# Altium PCB Master-Slave.PcbDoc (part 2 of 2)
Units mil, origin at the board's own origin, x right, y up, seen from the top; angles counter-clockwise.
Board outline 5500 x 5500 mil, 4 copper layers (Top Layer, Ground, Power, Bottom Layer); 264 components, 141 nets, 902 pads, 458 vias.
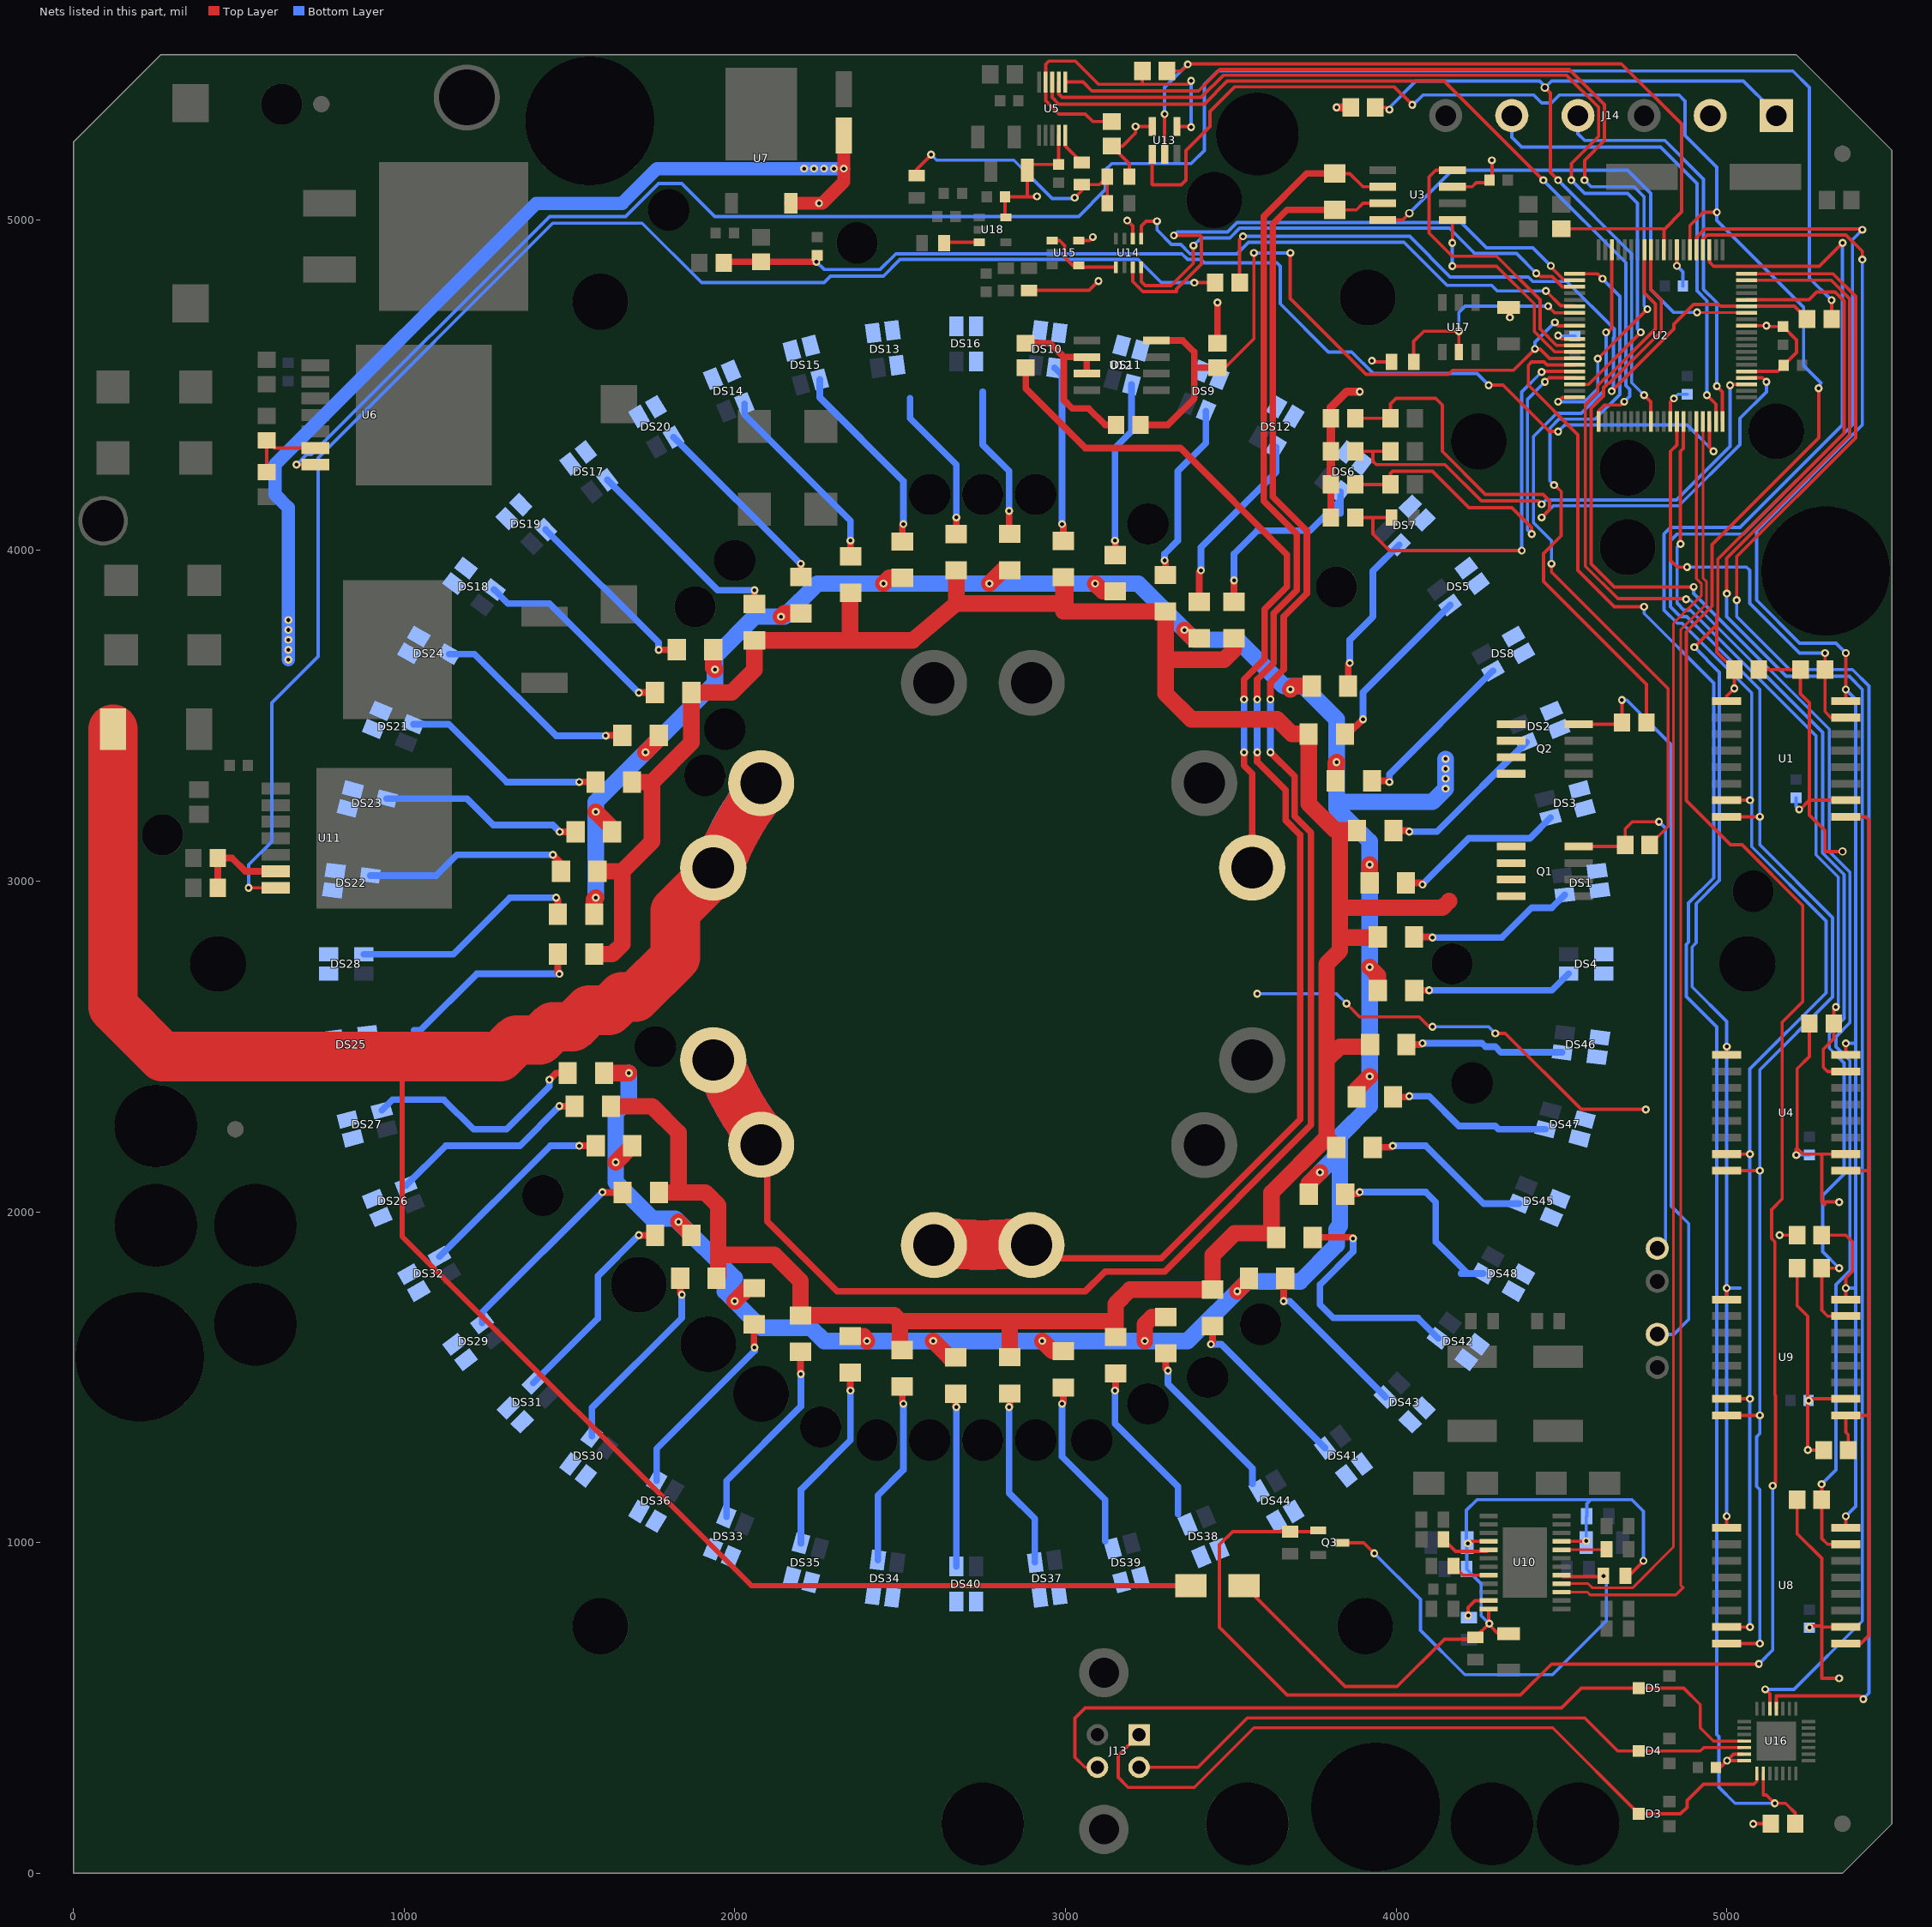
[diagram p4: the nets of this part, all layers, seen from the top]

## Via types
v1: diameter 24, hole 12, Top Layer to Bottom Layer, 374 vias
v2: diameter 25, hole 15, Top Layer to Bottom Layer, 64 vias
v3: diameter 31, hole 15, Top Layer to Bottom Layer, 15 vias
v4: diameter 28.03, hole 28, Top Layer to Bottom Layer, 4 vias
v5: diameter 33.86, hole 33.86, Top Layer to Bottom Layer, 1 vias

## Nets (pads, with @x,y where several pads share a name; then routed paths per layer and width w, separated by ;. In a path a pad name is that pad's centre, name@x,y a point inside that pad or via, vN(x,y) a via of type N, cw(c..) or ccw(c..) an arc to the next point about the centre after c; other vN are vias at no path point) (continued)
NetC44_2: C44.2 U10.23 | length 101.8
  Top Layer w10: v1(4218,780) 4218,804 4238.84,824.84 U10.23@4279.76,824.84
  Bottom Layer w10: v1(4218,780) 4218,775.46 C44.2@4220,773.46
NetC48_1: C48.1 R11.2 R12.1 R37.2 | length 786.6
  Top Layer w10: R12.1@2550,5133.46 2550,5153 v1(2594,5197) ; v1(3028,5067) 3050,5089 C48.1@3050,5106.54 3103.07,5106.54 R11.2@3126.54,5130 R37.2@3126.54,5050
  Bottom Layer w10: v1(2594,5197) 2610.5,5180.5 2843.85,5180.5 2959.85,5064.5 3025.5,5064.5 v1(3028,5067)
NetC48_2: C48.2 U5.10 | length 102.8
  Top Layer w10: U5.10@2999.37,5255.29 2999.37,5224.09 C48.2@3050,5173.46
NetC50_2: C50.2 R24.1 R25.2 U2.18 | length 3450.3
  Top Layer w10: v1(4280,4500) 4323.5,4500 4463.5,4360 v1(4490,4360) ; U2.18@4947.64,4390.16 4947.64,4312.36 v1(4960,4300)
  Top Layer w20: R24.1@1965,4873 R25.2@2080,4873 v1(2247,4873)
  Bottom Layer w10: v1(2247,4873) 2270,4850 2440,4850 2487.5,4897.5 3352.1,4897.5 3369.6,4880 3410,4880 3420,4870 3640,4870 3650,4860 3650,4746 3795.39,4600.61 3865.74,4600.61 3930.85,4535.5 4244.5,4535.5 v1(4280,4500) ; v1(4490,4360) 4510,4380 4880,4380 v1(4960,4300)
NetD3_3: D3.3 J13.1 U16.8 | length 2357
  Top Layer w10: J13.1@3222.83,419.21 3160,356.38 3160,290 3190,260 3390,260 3570,440 4473.74,440 D3.3@4733.74,180 4860,180 4880,200 4880,220 4930,270 5082,270 5090.94,278.94 U16.8@5090.94,302.4
NetD4_3: D4.3 J13.2 U16.5 | length 1934.1
  Top Layer w10: J13.2@3222.83,320.79 3400.79,320.79 3550,470 4570,470 4670,370 4920,370 4930.31,380.31 U16.5@5049.45,380.31
NetD5_3: D5.3 J13.3 U16.4 | length 2363.6
  Top Layer w10: J13.3@3096.85,320.79 3059.21,320.79 3029.21,350.79 3029.21,469.21 3060,500 4500,500 4560,560 4870,560 4920,510 4920,440 4960,400 U16.4@5049.45,400
NetDS1_1: DS1.1 DS1.3 DS1.4 R46.2 | length 509.6
  Top Layer w20: R46.2@4054.68,2831.91 4108.09,2831.91 v1(4110,2830)
  Bottom Layer w20: v1(4110,2830) 4320,2830 4410,2920 4471.37,2920 DS1.3@4510.16,2958.79
NetDS2_1: DS2.1 DS2.3 DS2.4 R47.2 | length 515.3
  Top Layer w20: R47.2@3992.13,3152.98 4037.02,3152.98 v1(4040,3150)
  Bottom Layer w20: v1(4040,3150) 4123.82,3150 DS2.3@4394.2,3420.38
NetDS3_1: DS3.1 DS3.3 DS3.4 R58.2 | length 523.3
  Top Layer w20: R58.2@4030,2995 4075,2995 v1(4080,2990)
  Bottom Layer w20: v1(4080,2990) 4220,3130 4404.58,3130 DS3.3@4467.3,3192.72
NetDS4_1: DS4.1 DS4.3 DS4.4 R59.2 | length 487.8
  Top Layer w20: R59.2@4055,2670 v1(4100,2670)
  Bottom Layer w20: v1(4100,2670) 4471.38,2670 DS4.3@4521.85,2720.47
NetDS5_1: DS5.1 DS5.3 DS5.4 R48.2 | length 527.3
  Top Layer w20: R48.2@3845.71,3445.38 3855.38,3445.38 v1(3900,3490)
  Bottom Layer w20: v1(3900,3490) 3900,3571.41 DS5.3@4163.81,3835.22
NetDS6_1: DS6.1 DS6.3 DS6.4 R49.2 | length 600
  Top Layer w20: R49.2@3510,3845 v1(3510,3910)
  Bottom Layer w20: v1(3510,3910) 3510,3990 3580,4060 3740,4060 DS6.3@3832.07,4152.07 ; 3832.07,4112.07 DS6.3@3832.07,4177.86
NetDS7_1: DS7.1 DS7.3 DS7.4 R60.2 | length 491.4
  Top Layer w20: R60.2@3855,3590 3855,3655 v1(3860,3660)
  Bottom Layer w20: v1(3860,3660) 3860,3730 3930,3800 3930,3938.24 DS7.3@4009.3,4017.54
NetDS8_1: DS8.1 DS8.3 DS8.4 R61.2 | length 519.4
  Top Layer w20: R61.2@3927.42,3303.51 3976.49,3303.51 v1(3980,3300)
  Bottom Layer w20: v1(3980,3300) 3980,3323.12 DS8.3@4292.73,3635.85
NetDS9_1: DS9.1 DS9.3 DS9.4 R50.2 | length 548.8
  Top Layer w20: v1(3300,3970) 3302.66,3967.34 R50.2@3302.66,3925.69
  Bottom Layer w20: v1(3300,3970) 3300,3990 3340,4030 3340,4240 3424.94,4324.94 DS9.3@3424.94,4421.6
NetDS10_1: DS10.1 DS10.3 DS10.4 R51.2 | length 534
  Top Layer w20: v1(2990,4080) 2993.53,4076.47 R51.2@2993.53,4029.3
  Bottom Layer w20: DS10.3@2967.34,4552.45 2990,4529.79 v1(2990,4080)
NetDS11_1: DS11.1 DS11.3 DS11.4 R62.2 | length 536.6
  Top Layer w20: v1(3150,4030) 3151.06,4028.94 R62.2@3151.06,3986.48
  Bottom Layer w20: v1(3150,4030) 3150,4310 3199.77,4359.77 DS11.3@3199.77,4502.02
NetDS12_1: DS12.1 DS12.3 DS12.4 R63.2 | length 564.5
  Top Layer w20: R63.2@3404.82,3844.88 3404.82,3934.82 v1(3410,3940)
  Bottom Layer w20: v1(3410,3940) 3410,4010 3637,4237 DS12.3@3637,4313.21
NetDS13_1: DS13.1 DS13.3 DS13.4 R52.2 | length 468
  Top Layer w20: R52.2@2670,4050 v1(2670,4100)
  Bottom Layer w20: 2530,4460 2530,4400 2670,4260 v1(2670,4100)
NetDS14_1: DS14.1 DS14.3 DS14.4 R53.2 | length 594.7
  Top Layer w20: v1(2350,4030) 2350.35,4029.65 R53.2@2350.35,3982.34
  Bottom Layer w20: DS14.3@2029.62,4444.2 2029.62,4410.38 2350,4090 v1(2350,4030)
NetDS15_1: DS15.1 DS15.3 DS15.4 R64.2 | length 595.9
  Top Layer w20: R64.2@2506.86,4027.36 2506.86,4076.86 v1(2510,4080)
  Bottom Layer w20: DS15.3@2257.28,4517.3 2257.28,4462.72 2510,4210 v1(2510,4080)
NetDS16_1: DS16.1 DS16.3 DS16.4 R65.2 | length 461.1
  Top Layer w20: R65.2@2830,4052.08 v1(2830,4120)
  Bottom Layer w20: 2750,4480 2750,4320 2830,4240 v1(2830,4120)
NetDS17_1: DS17.1 DS17.3 DS17.4 R54.2 | length 625.3
  Top Layer w20: R54.2@2059.51,3838.39 2059.51,3879.51 v1(2060,3880)
  Bottom Layer w20: DS17.3@1614.78,4213.81 1948.59,3880 v1(2060,3880)
NetDS18_1: DS18.1 DS18.3 DS18.4 R55.2 | length 616.4
  Top Layer w20: v1(1710,3570) 1711.02,3571.02 R55.2@1758.81,3571.02
  Bottom Layer w20: DS18.3@1272.14,3882.07 1314.21,3840 1440,3840 v1(1710,3570)
NetDS19_1: DS19.1 DS19.3 DS19.4 R66.2 | length 559.8
  Top Layer w20: v1(1770,3700) R66.2@1825,3700
  Bottom Layer w20: DS19.3@1428.46,4063.3 1770,3721.76 v1(1770,3700)
NetDS20_1: DS20.1 DS20.3 DS20.4 R67.2 | length 583.2
  Top Layer w20: v1(2200,3960) 2200.06,3959.94 R67.2@2200.06,3920.17
  Bottom Layer w20: DS20.3@1815.15,4342.73 2197.88,3960 v1(2200,3960)
NetDS21_1: DS21.1 DS21.3 DS21.4 R56.2 | length 623.3
  Top Layer w20: v1(1530,3300) 1530.26,3300.26 R56.2@1579.17,3300.26
  Bottom Layer w20: DS21.3@1028.4,3474.94 1135.06,3474.94 1310,3300 v1(1530,3300)
NetDS22_1: DS22.1 DS22.3 DS22.4 R57.2 | length 638.8
  Top Layer w20: v1(1450,3080) 1475,3055 R57.2@1475,3030
  Bottom Layer w20: DS22.3@897.55,3017.34 1097.34,3017.34 1160,3080 v1(1450,3080)
NetDS23_1: DS23.1 DS23.3 DS23.4 R68.2 | length 612.5
  Top Layer w20: v1(1470.76,3149.24) R68.2@1518.86,3149.24
  Bottom Layer w20: DS23.3@947.98,3249.77 1190.23,3249.77 1270,3170 1450,3170 v1(1470.76,3149.24)
NetDS24_1: DS24.1 DS24.3 DS24.4 R69.2 | length 626.5
  Top Layer w20: v1(1610,3440) 1611.3,3441.3 R69.2@1660.39,3441.3
  Bottom Layer w20: DS24.3@1136.79,3687 1213,3687 1460,3440 v1(1610,3440)
NetDS25_1: DS25.1 DS25.3 DS25.4 R88.2 | length 572.5
  Top Layer w20: R88.2@1465,2780 1465,2725 v1(1470,2720)
  Bottom Layer w20: 1030,2550 1050,2550 1220,2720 v1(1470,2720)
NetDS26_1: DS26.1 DS26.3 DS26.4 R89.2 | length 609.5
  Top Layer w20: v1(1470,2320) 1470.37,2319.63 R89.2@1515.55,2319.63
  Bottom Layer w20: DS26.3@1005.8,2079.62 1126.18,2200 1350,2200 v1(1470,2320)
NetDS27_1: DS27.1 DS27.3 DS27.4 R100.2 | length 695.3
  Top Layer w20: v1(1440,2400) 1460,2420 R100.2@1495,2420
  Bottom Layer w20: DS27.3@932.7,2307.28 965.42,2340 1120,2340 1210,2250 1310,2250 1440,2380 v1(1440,2400)
NetDS28_1: DS28.1 DS28.3 DS28.4 R101.2 | length 704.5
  Top Layer w20: v1(1460,2950) 1465,2945 R101.2@1465,2900
  Bottom Layer w20: DS28.3@878.15,2779.53 1149.53,2779.53 1320,2950 v1(1460,2950)
NetDS29_1: DS29.1 DS29.3 DS29.4 R90.2 | length 607.3
  Top Layer w20: v1(1600,2060) 1600.88,2059.12 R90.2@1661.02,2059.12
  Bottom Layer w20: DS29.3@1236.19,1664.78 1236.19,1696.19 v1(1600,2060)
NetDS30_1: DS30.1 DS30.3 DS30.4 R91.2 | length 592.6
  Top Layer w20: R91.2@1835,1800 1835,1755 v1(1840,1750)
  Bottom Layer w20: DS30.3@1567.93,1322.14 1567.93,1407.93 1840,1680 v1(1840,1750)
NetDS31_1: DS31.1 DS31.3 DS31.4 R102.2 | length 629.3
  Top Layer w20: v1(1710,1930) 1710.66,1929.34 R102.2@1759.22,1929.34
  Bottom Layer w20: DS31.3@1390.7,1482.46 1586.13,1677.89 1586.13,1806.13 v1(1710,1930)
NetDS32_1: DS32.1 DS32.3 DS32.4 R103.2 | length 611.5
  Top Layer w20: v1(1530,2200) 1530.14,2200.14 R103.2@1580,2200.14
  Bottom Layer w20: DS32.3@1107.27,1865.15 1442.12,2200 v1(1530,2200)
NetDS33_1: DS33.1 DS33.3 DS33.4 R92.2 | length 592.4
  Top Layer w20: R92.2@2198.71,1577.1 2198.71,1511.29 v1(2200,1510)
  Bottom Layer w20: DS33.3@1975.06,1078.4 1975.06,1187.04 2200,1411.98 v1(2200,1510)
NetDS34_1: DS34.1 DS34.3 DS34.4 R93.2 | length 558.1
  Top Layer w20: R93.2@2506.78,1472.25 2506.78,1423.22 v1(2510,1420)
  Bottom Layer w20: DS34.3@2432.66,947.55 2432.66,1142.66 2510,1220 v1(2510,1420)
NetDS35_1: DS35.1 DS35.3 DS35.4 R104.2 | length 578.6
  Top Layer w20: R104.2@2349.19,1514.26 2349.19,1460.81 v1(2350,1460)
  Bottom Layer w20: DS35.3@2200.23,997.98 2200.23,1160.23 2350,1310 v1(2350,1460)
NetDS36_1: DS36.1 DS36.3 DS36.4 R105.2 | length 596.5
  Top Layer w20: R105.2@2058.45,1660.02 2058.45,1591.55 v1(2060,1590)
  Bottom Layer w20: DS36.3@1764,1186.79 1764,1284 2060,1580 v1(2060,1590)
NetDS37_1: DS37.1 DS37.3 DS37.4 R94.2 | length 542.6
  Top Layer w20: v1(2830,1410) 2831.53,1411.53 R94.2@2831.53,1451.1
  Bottom Layer w20: v1(2830,1410) 2830,1150 2907.41,1072.59 DS37.3@2907.41,941.21
NetDS38_1: DS38.1 DS38.3 DS38.4 R95.2 | length 505.8
  Top Layer w20: v1(3150,1460) 3151.68,1461.68 R95.2@3151.68,1511.69
  Bottom Layer w20: v1(3150,1460) 3150,1360 3340.61,1169.39 3340.61,1085.57
NetDS39_1: DS39.1 DS39.3 DS39.4 R106.2 | length 519.5
  Top Layer w20: v1(2990,1420) 2993.89,1423.89 R106.2@2993.89,1468.91
  Bottom Layer w20: v1(2990,1420) 2990,1260 3120.36,1129.64 DS39.3@3120.36,1005.06
NetDS40_1: DS40.1 DS40.3 DS40.4 R107.2 | length 522.9
  Top Layer w20: R107.2@2668.41,1450.16 2668.41,1411.59 v1(2670,1410)
  Bottom Layer w20: v1(2670,1410) 2670,928.62 DS40.3@2670.47,928.15
NetDS41_1: DS41.1 DS41.3 DS41.4 R96.2 | length 532.4
  Top Layer w20: v1(3440,1600) 3444.76,1604.76 R96.2@3444.76,1655.22
  Bottom Layer w20: v1(3440,1600) 3471.41,1600 DS41.3@3785.22,1286.19
NetDS42_1: DS42.1 DS42.3 DS42.4 R97.2 | length 760.6
  Top Layer w20: R97.2@3747.65,1923.32 v1@3866.68,1923.32
  Bottom Layer w20: v1(3870,1920) 3870,1880 3770,1780 3770,1720 3810,1680 4065.79,1680 DS42.3@4127.86,1617.93
NetDS43_1: DS43.1 DS43.3 DS43.4 R108.2 | length 492.4
  Top Layer w20: v1(3660,1730) R108.2@3660,1795
  Bottom Layer w20: v1(3660,1730) 3678.24,1730 DS43.3@3967.54,1440.7
NetDS44_1: DS44.1 DS44.3 DS44.4 R109.2 | length 503.2
  Top Layer w20: R109.2@3303.58,1572.46 3303.58,1526.42 v1(3310,1520)
  Bottom Layer w20: v1(3310,1520) 3310,1480 3565.43,1224.57 DS44.3@3565.43,1177.69
NetDS45_1: DS45.1 DS45.3 DS45.4 R98.2 | length 516.7
  Top Layer w20: R98.2@3929.23,2195.59 3985.59,2195.59 v1(3990,2200)
  Bottom Layer w20: v1(3990,2200) 4090,2200 4264.94,2025.06 DS45.3@4371.6,2025.06
NetDS46_1: DS46.1 DS46.3 DS46.4 R99.2 | length 484
  Top Layer w20: R99.2@4031.39,2506.06 4076.06,2506.06 v1(4080,2510)
  Bottom Layer w20: v1(4080,2510) 4260,2510 4270,2500 4300,2500 4317.34,2482.66 DS46.3@4502.45,2482.66
NetDS47_1: DS47.1 DS47.3 DS47.4 R110.2 | length 503.8
  Top Layer w20: R110.2@3990.61,2347.54 4037.54,2347.54 v1(4040,2350)
  Bottom Layer w20: v1(4040,2350) 4100,2350 4190,2260 4300,2260 4309.77,2250.23 DS47.3@4452.02,2250.23
NetDS48_1: DS48.1 DS48.3 DS48.4 R111.2 | length 658.7
  Top Layer w20: R111.2@3846.27,2054.25 3884.25,2054.25 v1(3890,2060)
  Bottom Layer w20: v1(3890,2060) 3950,2060 4090,2060 4120,2030 4120,1910 4216,1814 DS48.3@4263.21,1814 4196,1814
NetDS49_1: DS49.1 Q1.4 R28.2 | length 1603.4
  Top Layer w10: Q1.4@4552.36,3105 R28.2@4688,3105 ; R28.2@4693,3110 4693,3158 4715,3180 v1(4795,3180)
  Bottom Layer w10: DS49.1@4790,1890 4815,1915 4815,3160 v1(4795,3180)
NetDS50_1: DS50.1 Q2.4 R40.2 | length 2272.4
  Top Layer w10: Q2.4@4552.36,3475 R40.2@4678,3475 ; R40.2@4683,3480 v1(4683,3548)
  Bottom Layer w10: v1(4683,3548) 4697.36,3548 4832.5,3412.86 4832.5,2017.5 4885,1965 4885,1675 4840,1630 DS50.1@4790,1630
NetJ3_1: J3.1 J7.1 R5.2 U3.7 | length 6014.2
  Top Layer w10: R5.2@3815,5030 3880,5030 3900,5050 U3.7@3959.68,5050
  Top Layer w20: J3.1@2098.18,2203.06 2098.18,1971.82 2310,1760 3060,1760 3120,1820 3300,1820 3742.9,2262.9 3742.9,3147.1 3693.21,3196.79 3693.21,3316.79 v1(3620,3390) ; v1(3620,3550) 3620,3600 3660,3640 3660,3800 3730,3870 3730,4060 3627.5,4162.5 3627.5,4987.5 3670,5030 R5.2@3815,5030
  Top Layer w150: J7.1@1951.63,2459.42 ccw(c2750,2750) J3.1@2099.16,2203.88
  Bottom Layer w20: J7.1@1932.21,2440 J7.1@1951.63,2459.42 ; v1(3620,3390) v1(3620,3550)
  Bottom Layer w150: J7.1@1951.63,2459.42 ccw(c2750,2750) J3.1@2099.16,2203.88
NetJ4_1: J4.1 J8.1 R5.1 U3.6 | length 5203.5
  Top Layer w10: R5.1@3815,5140 3860,5140 3900,5100 U3.6@3959.68,5100
  Top Layer w20: J4.1@2897.59,1912.95 2950.55,1860 3290,1860 3710,2280 3710,3140 3665.71,3184.29 3665.71,3275.4 3580,3361.11 v1(3580,3390) ; v1(3580,3550) 3580,3610 3630,3660 3630,3810 3700,3880 3700,4050 3600,4150 3600,5010 3730,5140 R5.1@3815,5140
  Top Layer w150: J8.1@2602.41,1912.95 ccw(c2750,2750) J4.1@2897.59,1912.95
  Bottom Layer w20: v1(3580,3390) v1(3580,3550)
  Bottom Layer w150: J8.1@2602.41,1912.95 ccw(c2750,2750) 2602.87,1912.87 ccw(c2750,2750) 2897.59,1912.95 cw(c2750,2750) J8.1@2602.41,1912.95
NetJ11_1: J11.1 R128.1 | length 2155.4
  Top Layer w10: J11.1@3580,3011.71 3550.39,3041.32 J11.1@3580,3070.93
  Top Layer w20: R128.1@2880,4553 2880,4490 3060,4310 3347.78,4310 3670,3987.78 3670,3890 3602.5,3822.5 3602.5,3672.5 3540,3610 v1(3540,3550) ; v1(3540,3390) 3540,3350 3565,3325 J11.1@3565,3041.32
  Bottom Layer w20: v1(3540,3390) v1(3540,3550)
NetJ14_1: J14.1 R4.1 U2.9 | length 2451.6
  Top Layer w10: R4.1@3937,5340 3973,5340 v1(3980,5333) ; v2(4450,5400) 4466.33,5383.67 4466.33,5143.67 v1(4490,5120) ; v1(4750,4470) 4770.47,4449.53 U2.9@4770.47,4390.16
  Bottom Layer w10: v1(3980,5333) 3980,5340 4060,5420 4434.12,5420 v2@4452.06,5402.06 ; v2(4450,5400) 4470,5420 5050,5420 5135,5335 J14.1@5150,5335 ; v1(4490,5120) 4712.5,4897.5 4712.5,4507.5 v1(4750,4470)
NetJ14_4: J14.4 U2.20 | length 1267.9
  Top Layer w10: v1(4970,4497.01) 4987.01,4480 U2.20@4987.01,4390.16
  Bottom Layer w10: J14.4@4550,5335 4550,5260 4570,5240 4812.5,5240 4930,5122.5 4930,4790 4970,4750 v1(4970,4497.01)
NetJ14_5: J14.5 U2.19 | length 1446.6
  Top Layer w10: v1(4940,4470) 4967.32,4442.68 U2.19@4967.32,4390.16
  Bottom Layer w10: J14.5@4350,5335 4350,5250 4380,5220 4800,5220 4910,5110 4910,4785.25 4940,4755.25 v1(4940,4470)
NetJP1_1: JP1.1 R19.1 U2.24 | length 1887.3
  Top Layer w10: R19.1@3877,4400 JP1.1@3983,4400 3983,4443 4000,4460 4120,4460 4140,4440 4140,4300 4270,4170 4444.65,4170 4464.5,4150.15 4464.5,4124.5 v1(4440,4100) ; U2.24@5059.84,4522.05 5107.95,4522.05 v1(5120,4510)
  Bottom Layer w10: v1(4440,4100) 4475.5,4135.5 4854.9,4135.5 5040,4320.6 5040,4400 5120,4480 v1(5120,4510)
NetJP2_1: JP2.1 R23.1 U2.23 | length 1577.9
  Top Layer w10: R23.1@3877,4300 JP2.1@3983,4300 ; 3930,4300 3930,4270 3940,4260 4147.5,4260 4257.5,4150 4430,4150 v1(4440,4140) ; v1(5010,4500) 5012.36,4502.36 U2.23@5059.84,4502.36
  Bottom Layer w10: v1(4440,4140) 4453,4153 4847.65,4153 5010,4315.35 v1(5010,4500)
NetJP3_1: JP3.1 R26.1 U2.77 | length 1241.4
  Top Layer w10: R26.1@3877,4200 JP3.1@3983,4200 3983,4233 3990,4240 4110,4240 4220,4130 4350,4130 4410,4070 v1(4410,4050) ; v1(4450,4510) 4462.05,4522.05 U2.77@4540.16,4522.05
  Bottom Layer w10: v1(4410,4050) 4397.5,4062.5 4397.5,4457.5 v1(4450,4510)
NetJP4_1: JP4.1 R27.1 U2.76 | length 1292.4
  Top Layer w10: R27.1@3877,4100 JP4.1@3983,4100 ; 3930,4100 3930,4050 3960,4020 3980,4000 v1(4380,4000) ; v1(4440,4540) 4441.73,4541.73 U2.76@4540.16,4541.73
  Bottom Layer w10: v1(4380,4000) 4380,4480 v1(4440,4540)
NetQ1_5: Q1.5 Q1.6 Q1.7 Q1.8 R46.1 R47.1 R48.1 R49.1 R50.1 R51.1 R52.1 R53.1 R54.1 R55.1 R56.1 R57.1 R88.1 R89.1 R90.1 R91.1 R92.1 R93.1 R94.1 R95.1 R96.1 R97.1 R98.1 R99.1 | length 9576.5
  Top Layer w50: R88.1@1575,2780 1630,2780 1660,2810 1660,3030 ; R57.1@1585,3030 1660,3030 ; R89.1@1625.55,2319.63 1750.37,2319.63 1830,2240 1830,2059.12 ; R56.1@1689.44,3300 1750,3300 ; R90.1@1771.02,2059.12 1910.88,2059.12 1950,2020 1950,1805 R91.1@1945,1800 ; 1950,1870 2120,1870 2198.71,1791.29 R92.1@2198.71,1687.1 2482.9,1687.1 2500,1670 ; 2348.39,3728.39 R53.1@2348.39,3870.38 ; R93.1@2506.78,1582.25 2500,1589.03 2500,1670 ; R52.1@2670,3940 2670,3840 ; R94.1@2831.53,1561.1 2831.53,1668.47 ; R51.1@2993.53,3919.3 3000,3912.82 3000,3840 2670,3840 ; R51.1@2994.31,3918.51 2994.31,3815.69 R50.1@3302.66,3815.69 3302.66,3567.34 3380,3490 3640,3490 3684.62,3445.38 R48.1@3735.71,3445.38 3735.71,3234.29 3815.71,3154.29 R47.1@3880.82,3154.29 ; R95.1@3151.68,1621.69 3151.68,1721.68 3195.22,1765.22 R96.1@3444.76,1765.22 3444.76,1868.69 3511.57,1935.5 3625.47,1935.5 R97.1@3637.65,1923.32 3623.5,1937.47 3623.5,2058.32 3790,2224.82 ; 3151.68,1670 3141.68,1660 3131.68,1670 2500,1670 ; 3302.66,3670 3480,3670 3510,3700 R49.1@3510,3735 ; 3790,2460 3830,2500 3915.33,2500 R99.1@3921.39,2506.06 ; R98.1@3819.23,2195.59 3790,2224.82 ; 3830,2830 3942.77,2830 R46.1@3944.68,2831.91 ; 3830,2920 4140,2920 4160,2940 ; 3830,3154.29 3830,2790 3790,2750 3790,2224.82 ; 1660,3030 1750,3120 1750,3300 ; 1750,3300 1868.81,3418.81 R55.1@1868.81,3571.02 1991.02,3571.02 2059.51,3639.51 R54.1@2059.51,3728.39 2538.39,3728.39 2670,3840
NetQ2_5: Q2.5 Q2.6 Q2.7 Q2.8 R58.1 R59.1 R60.1 R61.1 R62.1 R63.1 R64.1 R65.1 R66.1 R67.1 R68.1 R69.1 R100.1 R101.1 R102.1 R103.1 R104.1 R105.1 R106.1 R107.1 R108.1 R109.1 R110.1 R111.1 | length 9819.7
  Top Layer w50: R101.1@1575,2900 1575,2945 v1(1580,2950) ; v1(1580,3210) 1628.86,3161.14 R68.1@1628.86,3149.24 ; R100.1@1605,2420 v1(1680,2420) ; v1(1640,2150) 1690,2200 R103.1@1690,2200.14 ; v1(1730,3390) 1770.39,3430.39 R69.1@1770.39,3441.3 ; v1(1830,1970) 1869.22,1930.78 R102.1@1869.22,1929.34 ; R66.1@1935,3700 1935,3645 v1(1940,3640) ; v1(2000,1730) 2040.02,1770.02 R105.1@2058.45,1770.02 ; v1(2140,3800) 2150.17,3810.17 R67.1@2200.06,3810.17 ; R104.1@2349.19,1624.26 2390,1624.26 2390,1620 v1(2400,1610) ; v1(2450,3900) 2467.36,3917.36 R64.1@2506.86,3917.36 ; v1(2600,1610) 2649.84,1560.16 R107.1@2668.41,1560.16 ; v1(2770,3900) 2810.45,3940.45 R65.1@2831.63,3940.45 ; v1(2930,1610) 2961.09,1578.91 R106.1@2993.89,1578.91 ; v1(3090,3900) 3113.52,3876.48 R62.1@3151.06,3876.48 ; v1(3240,1610) 3240,1660 3262.46,1682.46 R109.1@3303.58,1682.46 ; v1(3360.16,3759.84) 3385.12,3734.88 R63.1@3404.82,3734.88 ; v1(3520,1760) 3555,1795 R108.1@3555,1800 ; v1(3680,3580) 3690,3590 R60.1@3745,3590 ; R111.1@3736.27,2054.25 3736.27,2086.27 v1(3770,2120) ; R61.1@3817.42,3303.51 3817.42,3357.42 v1(3820,3360) ; R110.1@3880.61,2347.54 3880.61,2370.61 v1(3920,2410) ; v1(3920,2740) 3945,2715 R59.1@3945,2670 ; R58.1@3920,2995 v1(3920,3050)
  Bottom Layer w50: v1(1580,2950) 1580,3240 1940,3600 1940,3680 2060,3800 2150,3800 2250,3900 3220,3900 3390,3730 3520,3730 3660,3590 3720,3590 3820,3490 3820,3220 3920,3120 3920,2320 3830,2230 3830,2180 ; v1(1680,2420) 1680,2340 1640,2300 1640,2090 1750,1980 1820,1980 2000,1800 1970,1760 2080,1650 2230,1650 2270,1610 3370,1610 3550,1790 3640,1790 3710,1790 3820,1900 3820,1947.5 3830,1957.5 3830,2180 ; v1(3770,2120) 3830,2180 ; 3820,3240 4110,3240 v1(4150,3280) v1(4150,3310) v1(4150,3340) v1(4150,3370)
NetQ3_1: Q3.1 R34.2 U2.46 U13.1 | length 9753.3
  Top Layer w10: U13.1@3262.6,5197.68 3262.6,5107.4 3264.5,5105.5 3350.15,5105.5 3364.5,5119.85 3364.5,5209.5 3437,5282 3437,5328 3511,5402 3995,5402 v1(4049,5348) ; Q3.1@3764.57,1037.4 3760.63,1033.46 R34.2@3680,1033.46 3505.46,1033.46 3466,994 3466,744 3671,539 4376,539 4470,633 v1(5097,633) ; U2.46@4888.58,4909.84 4888.58,4982.58 4929,5023 v1(4970,5023) ; v1(5139,1172) 5147.5,1180.5 5147.5,1444.85 5145.5,1446.85 5145.5,1909.85 5135.5,1919.85 5135.5,2007.5 5167.5,2039.5 5167.5,2573.5 5229.81,2635.81 5229.81,2926.26 5046.07,3110 5011.1,3110 4877.5,3243.6 4877.5,3754.17 4955.5,3832.17 4955.5,4018.41 5278,4340.91 v1(5278,4491)
  Bottom Layer w10: v1(4049,5348) 4052,5348 4081.5,5377.5 4416.5,5377.5 4440,5354 4470,5354 4493.5,5377.5 4855.5,5377.5 4874,5359 4874,5255 4970,5159 v1(4970,5023) 4970,4998 5232.5,4735.5 5232.5,4558.5 5284.44,4506.56 v1(5278,4491) ; v1(5097,633) 5139,675 v1(5139,1172)
NetQ3_3: Q3.3 R16.1 U10.5 | length 1361.8
  Top Layer w10: Q3.3@3835.43,1000 3902,1000 v1(3934,968) ; U10.5@4500.24,901.61 4504.35,897.5 4624.04,897.5 R16.1@4626.54,900 v1(4627.54,899)
  Bottom Layer w10: v1(3934,968) 4073.51,828.49 4073.51,735.49 4208,601 4473,601 4636,764 4636,899 v1(4627.54,899)
NetR1_2: R1.2 U1.9 U2.36 U4.9 U8.9 U9.9 | length 4707.6
  Top Layer w10: v1(4902,3708) 4970,3776 4970,3800 ; U8.9@4999.88,1045 v1(4999.88,1079.88) ; U9.9@4999.88,1735 v1(4999.88,1769.88) ; U4.9@4999.88,2475 v1@4999.88,2499.88 ; U1.9@4999.88,3545 4999.88,3559.88 v1(5023,3583) R1.2@5023,3640 4970,3693 4970,3800 ; U2.36@5059.84,4758.27 5248.27,4758.27 5271.5,4781.5 5327.15,4781.5 5354.5,4754.15 5354.5,4355.66 4973,3974.16 4973,3803 4970,3800
  Bottom Layer w10: v1(4902,3708) 4978,3632 4978,3002.38 4907.93,2932.3 4907.93,2814.03 4895.19,2801.29 4895.19,2680.7 4999.88,2576.01 v1(4999.88,1769.88) ; v1(4999.88,1079.88) v1(4999.88,1769.88) ; 5039.88,1769.88 v1(4999.88,1769.88)
  other v1: 5000,2500
NetR2_2: R2.2 U1.1 U4.1 U8.1 U9.1 | length 2856.9
  Top Layer w10: U8.1@5360.12,695 5405,695 5430,720 5430,3185 5420,3195 U1.1@5360.12,3195 ; U4.1@5360.12,2125 5425,2125 ; R2.2@5367,1280 5367,1327 5360.12,1333.88 U9.1@5360.12,1385 5425,1385
NetR3_1: R3.1 U1.7 U2.13 | length 1317.2
  Top Layer w10: U2.13@4849.21,4390.16 4849.21,4319.21 4830,4300 4830,3970 4850,3950 v1(4880,3950) ; v1(5297,3690) 5297,3513 5315,3495 U1.7@5360.12,3495
  Bottom Layer w10: v1(4880,3950) 5060,3950 5070,3940 5070,3840 5220,3690 v1(5297,3690)
NetR6_1: R6.1 U2.14 U4.7 | length 2258.1
  Top Layer w10: v1(4860,4020) 4860,4300 4868.9,4308.9 U2.14@4868.9,4390.16 ; v1(5330,2620) 5324,2614 5324,2524 5292,2492 5292,2438 5305,2425 U4.7@5355.32,2425
  Bottom Layer w10: v1(4860,4020) 4850,4010 4850,3840 4870,3820 4890,3820 5270,3440 5270,3080 5337.5,3012.5 v1@5337.5,2620
NetR7_2: R7.2 R9.1 U6.6 | length 252.5
  Top Layer w10: R9.1@585,4237 R7.2@585,4333 608,4310 U6.6@732,4310
NetR8_1: R8.1 R29.1 U2.50 U13.2 | length 2656
  Top Layer w10: U13.2@3300,5197.68 v1(3300,5320) ; R29.1@3307,5450 3350,5450 v1(3370,5470) 3372,5472 4681.39,5472 4863.76,5289.63 4863.76,5023.76 4809.84,4969.84 ; R8.1@4500,4973 4806.68,4973 4809.84,4969.84 ; U2.50@4809.84,4909.84 4809.84,4969.84
  Bottom Layer w10: v1(3300,5320) 3300,5400 v1(3370,5470)
NetR10_1: R10.1 U2.52 U8.7 | length 4616
  Top Layer w10: U2.52@4770.47,4909.84 4770.47,4789.53 4802,4758 4802,4662.6 4645.9,4506.5 4641.85,4506.5 4627.5,4492.15 4627.5,4467.5 4590,4430 4590,3960 4660,3890 v1(4900,3890) ; v1(5287,1177) 5287,1013 5305,995 U8.7@5360.12,995
  Bottom Layer w10: v1(4900,3890) 4900,3870 5310,3460 5310,3090 5372.5,3027.5 5372.5,2572.5 5330,2530 5330,2500 5372.5,2457.5 5372.5,1822.5 5330,1780 5330,1220 v1(5287,1177)
NetR13_2: R13.2 U10.17 | length 153.4
  Top Layer w10: R13.2@4143.46,1010 4179.96,973.5 4274.88,973.5 U10.17@4279.76,978.39
NetR14_1: R14.1 U2.53 U9.7 | length 3993.5
  Top Layer w10: U2.53@4750.79,4909.84 4750.79,4779.21 4784.5,4745.5 4784.5,4669.85 4638.65,4524 4634.6,4524 4610,4499.4 4610,4480 4572.5,4442.5 4572.5,3952.75 4670.75,3854.5 4875.5,3854.5 v1(4877,3853) ; R14.1@5297,1840 R14.1@5287,1830 ; v1(5340,1830) R14.1@5287,1830 ; U9.7@5360.12,1685 5305,1685 5287,1703 R14.1@5287,1830
  Bottom Layer w10: v1(4877,3853) 4880,3850 4890,3850 5290,3450 5290,3085.25 5355,3020.25 5355,2585 5310,2540 5310,2495.25 5355,2450.25 5355,2115 5290,2050 5290,1880 v1(5340,1830)
NetR17_2: R17.2 R18.1 U11.6 | length 281.6
  Top Layer w20: R18.1@437,2980 R17.2@437,3070 480,3070 520,3030 U11.6@612,3030
NetR20_1: R20.1 R130.1 U2.35 | length 2300.6
  Top Layer w10: R20.1@3527,4810 3527,4940 v1(3537,4950) ; v1(4652,4482) 4840,4670 4840,4684.65 4899.85,4744.5 4975.5,4744.5 4981.42,4738.58 5204.42,4738.58 R130.1@5243,4700
  Bottom Layer w10: v1(3537,4950) 4041.25,4950 4163.67,4827.58 4399.77,4827.58 4413.85,4813.5 4516.15,4813.5 4659.5,4670.15 4659.5,4644.85 4657.5,4642.85 4657.5,4487.5 v1(4652,4482)
NetR20_2: R20.2 U11.7 | length 4608.6
  Top Layer w10: v1(530,2980) U11.7@612,2980 ; v1(3390,4810) R20.2@3453,4810
  Bottom Layer w10: v1(530,2980) 530,3050 600,3120 600,3540 740,3680 740,4280 1450,4990 1720,4990 1900,4810 2270,4810 2290,4830 2450,4830 2500,4880 3220,4880 3290,4810 v1(3390,4810)
NetR21_1: R21.1 U1.8 U2.44 U4.8 U8.8 U9.8 | length 5146.9
  Top Layer w10: U2.44@4927.95,4909.84 4927.95,4941.7 4940.75,4954.5 5360.15,4954.5 5410,4904.65 v1(5410,4880) ; R21.1@5287,1930 5360,1930 5380,1910 5380,1820 5360.12,1800.12 U9.8@5360.12,1735 ; v1(5360,3690) 5360.12,3689.88 U1.8@5360.12,3545 ; U8.8@5360.12,1045 v1(5360.12,1079.88) ; U4.8@5360.12,2475 v1(5360.12,2509.88)
  Bottom Layer w10: v1(5360,3690) 5330,3720 5220,3720 5090,3850 5090,4060 5410,4380 v1(5410,4880) ; v1(5360.12,1079.88) 5390,1109.76 5390,3550 v1(5360.12,3579.88) ; v1(5360.12,1769.88) 5389.88,1769.88 ; v1(5360.12,2509.88) 5389.88,2509.88
NetR22_1: R22.1 R128.2 U12.2 U12.3 | length 571.1
  Top Layer w20: R128.2@2880,4627 2953,4627 2995,4585 ; U12.3@3064.69,4535 U12.2@3064.69,4585 2995,4585 ; R22.1@3153,4380 3120,4380 3070,4430 3020,4430 2995,4455 2995,4585
NetR22_2: R22.2 R129.1 U2.69 U2.74 U12.8 | length 2357.5
  Top Layer w10: R129.1@3460,4553 3483,4553 3570,4640 v1(3570,4900) ; v1(3680,4900) 3680,4762.39 3909.5,4532.89 4158.4,4532.89 4170.5,4545 4355.4,4545 v1(4420,4609.6) 4435.65,4609.6 4464.15,4581.1 U2.74@4540.16,4581.1 ; v1(4480,4690) 4490.47,4679.53 U2.69@4540.16,4679.53
  Top Layer w20: R22.2@3227,4380 3310,4380 3390,4460 3390,4600 3355,4635 U12.8@3275.32,4635 ; 3390,4553 R129.1@3460,4553
  Bottom Layer w10: v1(3570,4900) v1(3680,4900) ; v1(4420,4609.6) 4420,4630 v1(4480,4690)
NetR28_1: R28.1 U2.58 | length 2135.9
  Top Layer w10: v1(4470,3960) 4470,3935.25 4822.5,3582.75 4822.5,3165.5 R28.1@4767,3110 ; v1(4635,4660) 4640,4660 4652.36,4672.36 U2.58@4652.36,4909.84
  Bottom Layer w10: v1(4470,3960) 4470,4030 4415.5,4084.5 4415.5,4344.9 4485.6,4415 4559.75,4415 4627.5,4482.75 4627.5,4492.15 4635,4499.65 v1(4635,4660)
NetR29_2: R29.2 R30.1 U5.4 U13.4 | length 1033.7
  Top Layer w10: R30.1@3140,5297 3083,5297 3060,5320 2980,5320 2940.32,5359.68 U5.4@2940.32,5416.71 2940.32,5470.32 2950,5480 3030,5480 3100,5410 3370,5410 v1(3380,5420) ; 3233,5413 R29.2@3233,5450 ; U13.4@3337.4,5282.32 3377.68,5282.32 v1(3380,5280)
  Bottom Layer w10: v1(3380,5280) v1(3380,5420)
NetR31_2: R31.2 U10.8 | length 137
  Top Layer w8: U10.8@4500.24,978.39 4634.92,978.39 R31.2@4636.54,980
NetR33_2: R33.2 U10.20 | length 118.1
  Top Layer w10: R33.2@4173.46,930 4201.85,901.61 U10.20@4279.76,901.61
NetR35_2: R35.2 U2.67 U17.2 | length 698
  Top Layer w10: R35.2@4053.46,4570 4053.46,4632.46 4084,4663 v1(4190,4663) U17.2@4190,4600 ; v1(4460,4739) 4480.1,4718.9 U2.67@4540.16,4718.9
  Bottom Layer w10: v1(4190,4663) 4190,4720 4209,4739 v1(4460,4739)
NetR36_2: R36.2 U18.3 | length 107.3
  Top Layer w10: R36.2@2633.46,4930 2636.06,4932.6 U18.3@2739.65,4932.6
NetR40_1: R40.1 U2.61 | length 1772.2
  Top Layer w10: v1(4478,4198) 4479.75,4198 4499.59,4178.15 4499.59,4151.85 4499.5,4151.75 4499.5,4044.5 4445.5,3990.5 4445.5,3906.5 4757,3595 R40.1@4757,3480 ; U2.61@4540.16,4837.01 4608.99,4837.01 v1(4624,4822)
  Bottom Layer w10: v1(4478,4198) 4465.5,4210.5 4465.5,4370.15 4492.85,4397.5 4602.15,4397.5 4677,4472.35 4677,4769 v1(4624,4822)
NetR112_1: R112.1 U2.75 U16.9 | length 5213
  Top Layer w10: U2.75@4540.16,4561.42 4456.08,4561.42 4447.5,4570 4410,4570 4400,4560 4400,4500 4550,4350 4550,3940 4660,3830 v1(4750,3830) ; U16.9@5110.63,302.4 5110.63,237.37 5119.63,237.37 v1(5145,212) 5178,212 5207,183 R112.1@5207,150
  Bottom Layer w10: v1(4750,3830) 4750,3810 4960.5,3599.5 4960.5,3009.88 4884.5,2933.88 4884.5,2815.34 4877.69,2808.54 4877.69,2651.8 4970,2559.5 4970,420 4976.44,413.56 4976.44,260.56 5025,212 v1(5145,212)
NetR130_2: R130.2 U6.7 | length 6108.5
  Top Layer w10: v1(675,4260) U6.7@732,4260 ; R130.2@5317,4700 v1(5317,4757)
  Bottom Layer w10: v1(675,4260) 705,4290 720,4290 1440,5010 1670,5010 1770,5110 1840,5110 1940,5010 2667,5010 2739,5010 2960,5010 3040,5010 3120,5090 3120,5150 3140,5170 3380,5170 3420,5210 3420,5410 3460,5450 5200,5450 5250,5400 5250,4824 v1(5317,4757)
NetU1_15: U1.15 U2.43 U4.15 U8.15 U9.15 | length 5593
  Top Layer w10: U2.43@4947.64,4909.84 4947.64,4872.36 4960,4860 5280,4860 v1(5350,4930) ; U8.15@4999.88,745 v1(5070,745) ; U9.15@4999.88,1435 v1(5070,1435) ; U4.15@4999.88,2175 v1(5070,2175) ; U1.15@4999.88,3245 v1(5070,3245)
  Bottom Layer w10: v1(5070,745) 5070,2432.5 5300,2662.5 5300,2880 5075.5,3104.5 5075.5,3569.25 4864.75,3780 4850,3780 4810,3820 4810,4050 4830,4070 5040,4070 5350,4380 v1(5350,4930)
NetU1_16: U1.16 U2.45 U4.16 U8.16 U9.16 | length 5897.4
  Top Layer w10: U2.45@4908.27,4909.84 4908.27,4946.76 4933.5,4972 5408,4972 v1(5410,4970) ; U8.16@4999.88,695 v1(5100,695) ; U9.16@4999.88,1385 v1(5100,1385) ; U4.16@4999.88,2125 v1(5100,2125) ; U1.16@4999.88,3195 v1(5100,3195)
  Bottom Layer w10: v1(5100,695) 5100,1160 5090,1170 5090,1320 5100,1330 5100,2430 5320,2650 5320,2890 5100,3110 5100,3580 4909.35,3770.65 4908.7,3770 4878.7,3800 4860,3800 4830,3830 4830,4030 4850,4050 5050,4050 5380,4380 5380,4940 v1(5410,4970)
NetU2_1: U2.1 U5.3 | length 2599.1
  Top Layer w10: U5.3@2960,5416.71 2960,5370 2980,5350 3420,5350 3489.5,5419.5 4145.5,5419.5 v1(4445,5120) ; U2.1@4612.99,4390.16 4612.99,4422.99 4630,4440 4680,4440 v1(4690,4450)
  Bottom Layer w10: v1(4445,5120) 4694.5,4870.5 4694.5,4499.55 4706.65,4487.4 4706.65,4466.65 v1(4690,4450)
NetU2_16: U2.16 U10.4 | length 3839.3
  Top Layer w8: U10.4@4500.24,876.02 4580.98,876.02 4593.11,863.89 4715.94,863.89 4839,986.95 4839,3779.92 4923.5,3864.42 4923.5,3899.73 4908.27,3914.97 U2.16@4908.27,4390.16
NetU2_17: U2.17 U10.3 | length 3946.3
  Top Layer w8: U10.3@4500.24,850.43 4578.57,850.43 4587,842 4846,842 4868,864 4861,871 4861,3761 4939,3839 4939,3906.15 4928,3917.15 4928,4390.11 U2.17@4927.95,4390.16
NetU2_34: U2.34 U3.8 | length 1510.3
  Top Layer w10: U3.8@3959.68,5000 4020,5000 v2(4040,5020) ; v1(4910,4720) U2.34@5059.84,4718.9
  Bottom Layer w10: v2(4040,5020) 4170,5150 4700,5150 4770,5080 4770,4790 4840,4720 v1(4910,4720)
NetU2_39: U2.39 U16.26 | length 5212.7
  Top Layer w10: v1(5000,3870) 5000,3976.41 5372,4348.41 5372,4761.4 5316.07,4817.32 U2.39@5059.84,4817.32 ; v1(5116.38,556.38) 5130.31,542.44 U16.26@5130.31,497.6
  Bottom Layer w10: v1(5000,3870) 5000,3800 5180,3620 5370,3620 5410,3580 5410,763 5203.38,556.38 v1(5116.38,556.38)
NetU2_40: U2.40 U16.25 | length 5339.2
  Top Layer w10: v1(5030,3850) 5030,3981.66 5389.5,4341.16 5389.5,4768.65 5321.14,4837.01 U2.40@5059.84,4837.01 ; U16.25@5150,497.6 5150,537 5403,537 v1(5413,527)
  Bottom Layer w10: v1(5030,3850) 5030,3800 5190,3640 5380,3640 5430,3590 5430,545 5412.87,527.87 5413,527.75 v1(5413,527)
NetU2_62: U2.62 U14.3 | length 1773.4
  Top Layer w10: U14.3@3203.78,4856.69 3203.78,4813.47 3234.25,4783 3336,4783 3336,4790.65 3411.5,4866.15 3411.5,4949.5 3408,4953 v1(3328,4953) ; v1(4468,4861) 4468,4857.62 4508.3,4817.32 U2.62@4540.16,4817.32
  Bottom Layer w10: v1(3328,4953) 3338,4963 3490.18,4963 3519.18,4992 4197,4992 4273.5,4915.5 4413.5,4915.5 v1(4468,4861)
NetU2_63: U2.63 U14.4 | length 1539.3
  Top Layer w10: U14.4@3229.37,4856.69 3229.37,4812.63 3241,4801 3320,4801 3387,4868 v1(3387,4922) ; v1(4424,4838) 4429,4833 4432,4833 4436.69,4828.31 4472.33,4828.31 4503.01,4797.64 U2.63@4540.16,4797.64
  Bottom Layer w10: v1(3387,4922) 3410.5,4945.5 3497.43,4945.5 3526.43,4974.5 4161.5,4974.5 4238,4898 ; 4236,4900 4238,4898 ; v1(4424,4838) 4364,4898 4238,4898
NetU2_66: U2.66 U14.5 | length 1505.7
  Top Layer w10: U14.5@3229.37,4943.31 3229.37,4981.37 3244,4996 v1(3277,4996) ; v1(4453,4785) 4498,4740 4538.74,4740 U2.66@4540.16,4738.58
  Bottom Layer w10: v1(3277,4996) 3277,4969.35 3320.85,4925.5 3348.85,4925.5 3376.85,4897.5 3519.15,4897.5 3553.65,4932.01 4023.99,4932.01 4154,4802 4289,4802 4306,4785 v1(4453,4785)
NetU2_72: U2.72 U3.4 | length 881.3
  Top Layer w10: U3.4@4170.31,5150 4120,5150 4100,5130 4100,4960 4170,4890 4304,4890 4435.5,4758.5 4435.5,4669.85 4484.88,4620.47 U2.72@4540.16,4620.47
NetU2_73: U2.73 U3.1 | length 666.7
  Top Layer w10: v1(4170,4860) 4304,4860 4418,4746 4418,4662.6 4479.82,4600.79 U2.73@4540.16,4600.79 ; v1@4170.31,4929.68 U3.1@4170.31,5000
  Bottom Layer w10: v1(4170,4860) v1(4170,4930)
NetU2_78: U2.78 U5.2 | length 2884.4
  Top Layer w10: U5.2@2979.69,5416.71 2979.69,5380.32 2990,5370 3410,5370 3477,5437 4516.39,5437 4612.5,5340.89 4612.5,5252.5 4530,5170 v1(4530,5120) ; U2.78@4540.16,4502.36 4582.36,4502.36 v1(4740,4660)
  Bottom Layer w10: v1(4530,5120) 4570,5080 4700,5080 4730,5050 4730,4670 v1(4740,4660)
NetU2_80: U2.80 U5.1 | length 3004.5
  Top Layer w10: U5.1@2999.37,5416.71 3053.29,5416.71 3080,5390 3402.81,5390 3467.31,5454.5 4523.64,5454.5 4630,5348.14 4630,5240 4570,5180 v1(4570,5120) ; v1(4490,4450) 4502.99,4462.99 U2.80@4540.16,4462.99 ; v1(4610,4580) v1(4760,4730)
  Bottom Layer w10: v1(4490,4450) 4570,4450 4610,4490 v1(4610,4580) ; v1(4570,5120) 4590,5100 4720,5100 4750,5070 4750,4740 v1(4760,4730)
NetU14_1: U14.1 U15.1 U15.4 | length 246.9
  Top Layer w10: U15.1@2959.65,4937.4 2982.6,4937.4 2998,4922 2998,4887 3022.4,4862.6 U15.4@3040.35,4862.6 3046.26,4856.69 U14.1@3152.6,4856.69
VAMP: C15.2 C17.2 C23.2 C24.2 C25.2 C28.2 D6.C R16.2 U10.9 U10.16 U10.24 | length 2495.9
  Top Layer w10: D6.C@3540.71,870 3845.71,565 4003,565 4146,708 4234.54,708 C15.2@4240,713.46 4240,714.47 4280.53,755 v1(4282,755) ; v1(4217,998) 4222.98,1003.98 U10.16@4279.76,1003.98 ; v1@4279.76,755 U10.24@4279.76,799.25 ; v1@4280.5,753.5 4308.88,725.12 C24.2@4340,725.12 ; U10.9@4500.24,1003.98 4573.98,1003.98 v1(4575,1005) ; R16.2@4693.46,900 4704,900 4748,944 v1(4748,945)
  Bottom Layer w10: v1(4217,998) 4217,998.12 C28.2@4215.12,1000 ; v1(4282,755) 4257.11,779.89 4257.11,876.36 C23.2@4213.46,920 4213.46,998.35 C28.2@4215.12,1000 ; v1(4575,1005) 4575,1078.46 C17.2@4576.54,1080 4576.54,1117.54 4589,1130 ; v1(4748,945) 4748,1095 4713,1130 4589,1130 ; C28.2@4215.12,1000 4213,1002.12 4213,1098 4245,1130 4589,1130
VBUS: D1.A D6.A J2.1 J6.1 | length 7308.8
  Top Layer w16: 994,2470 994,1926 2050,870 D6.A@3379.29,870
  Top Layer w150: D1.A@119.88,3460 119.88,2620.12 270,2470 994,2470 1290,2470 1340,2520 1410,2520 1450,2560 1510,2560 1560,2610 1620,2610 1660,2650 1700,2650 1820,2770 1820,2909.16 J2.1@1951.48,3040.64 ; J2.1@1951.48,3040.64 cw(c2750.61,2749.78) 2099.15,3296.41 ccw(c2750.61,2749.78) J2.1@1951.48,3040.64
  Bottom Layer w150: J2.1@1950.87,3040.86 cw(c2750,2750) J6.1@2098.55,3296.63
VCC: C2.2 C4.2 C8.1 C9.1 C10.2 C11.2 C19.2 C21.1 C32.2 C34.1 C47.2 C51.2 C52.2 C53.2 C54.2 C55.2 J14.2 R1.1 R2.1 R3.2 R4.2 R6.2 R10.2 R11.1 R14.2 R15.2 R19.2 R21.2 R23.2 R26.2 R27.2 R30.2 R35.1 R112.2 R129.2 U1.2 U2.12 U2.25 U2.32 U2.48 U2.71 U3.3 U4.2 U5.9 U7.3 U8.2 U9.2 U13.5 U14.6 U15.5 U16.6 U16.7 U18.5 | length 10466.8
  Top Layer w10: U18.5@2820.35,5007.4 2817.56,5010.2 C32.2@2817.56,5070 2883,5070 ; R15.2@2890,4786.54 3071.54,4786.54 v1(3100,4815) ; v1(2914,5071) 2913,5070 2883,5070 ; U5.9@2979.69,5255.29 2979.69,5167.87 C34.1@2980,5167.56 2902.68,5167.56 C19.2@2885.12,5150 2885.12,5072.12 2883,5070 ; U15.5@3040.35,4937.4 3072.4,4937.4 v1(3083,4948) ; v1(3187,4998) 3203.78,4981.22 U14.6@3203.78,4943.31 ; R11.1@3193.46,5130 3193.46,5169.54 R30.2@3140,5223 3173,5223 3212.32,5262.32 v1(3212.32,5282.32) U13.5@3262.6,5282.32 ; v1(3850,2630) 3890,2590 4070,2590 4100,2560 v1(4110,2560) ; v1(3927,4574) 3931,4570 R35.1@3986.54,4570 ; U3.3@4170.31,5100 4230,5100 4242,5112 C4.2@4290,5112 ; C4.2@4290,5117 v1(4290,5180) ; v1(4300,2540) 4330,2540 4560,2310 v1(4755,2310) ; C2.2@4340,4735.12 4340,4709 v1(4344,4705) ; v1(4490,4650) 4499.84,4640.16 U2.71@4540.16,4640.16 ; U2.12@4829.53,4390.16 4829.53,4449.53 v1(4840,4460) ; v1(4849.21,4860.79) U2.48@4849.21,4909.84 ; C55.2@4967.56,320 4980,320 v1(5000.94,340.94) ; U16.7@5049.45,340.94 v1(5000.94,340.94) ; U16.6@5049.45,360.63 5020.63,360.63 v1(5000.94,340.94) ; U2.25@5059.84,4541.73 5154.17,4541.73 C47.2@5172.44,4560 5211,4598.56 5211,4636.56 C52.2@5170,4677.56 5122.44,4677.56 v1(5120,4680) U2.32@5059.84,4679.53 ; v1(5080,150) R112.2@5133,150 ; R1.1@5097,3640 R3.2@5223,3640 5223,3567 5250,3540 5250,3245 ; v1(5160,1930) R21.2@5213,1930 ; v1(5210,2172) 5210,2190 5213,2193 ; R10.2@5213,1130 5213,1027 5287,953 5287,748 ; R14.2@5213,1830 5213,1717 5245,1685 v1@5245,1435 ; v1(5219,3217) 5222,3217 5250,3245 ; v1@5245,1429.56 v1@5245,1435 ; v1(5247.56,1429.56) 5245,1427 v1(5245,1280) R2.1@5293,1280 ; v1(5250,744) 5254,748 5287,748 ; R6.2@5250,2570 5250,2470 5213,2433 5213,2193 ; 5287,2172 5287,2030 ; 5292,745 U8.2@5360.12,745 ; 5296.83,2021.85 5287,2030 ; 5297,3090 v2(5350,3090) ; 5297,3095 5297,3153 5250,3200 5250,3245 ; v1(5340,590) 5287,590 5287,748 ; v1(5340,2030) 5287,2030 ; U9.2@5360.12,1435 v1@5245,1435 ; U4.2@5360.12,2175 5231,2175 5213,2193 ; U1.2@5360.12,3245 5250,3245
  Top Layer w20: R129.2@3460,4627 v1(3460,4750) ; R27.2@3803,4100 R26.2@3803,4200
  Top Layer w25: R26.2@3803,4200 3803,4433 3850,4480 v1(3890,4480) ; v1(3820,5340) R4.2@3863,5340
  Top Layer w40: U7.3@2169.96,5050.16 2265.16,5050.16 2330,5115 C21.1@2330,5255
  Bottom Layer w10: v1(3580,2660) 3820,2660 v1(3850,2630) ; v1(4110,2560) 4280,2560 v1(4300,2540) ; v1(4490,4650) 4491.97,4648.03 C54.2@4540.16,4648.03 ; v1(4840,4460) 4852.44,4472.44 C51.2@4880,4472.44 ; v1(4849.21,4860.79) 4867.56,4842.44 C53.2@4867.56,4800 ; v1(5210,2172) 5210.44,2172.44 C10.2@5250,2172.44 ; C11.2@5210,3252.44 5210,3226 v1(5219,3217) ; v1(5247.56,1429.56) C9.1@5247.56,1430 ; C8.1@5250,742.44 v1(5250,744)
  Bottom Layer w40: v1(650,3670) 650,4130 610,4170 610,4260 1400,5050 1660,5050 1765,5155 v1(2330,5155)
  other v1: 650,3700 650,3730 650,3760 650,3790 2255,5050.16 2210,5155 2240,5155 2270,5155 2300,5155
pads on no net: D2.1 D3.2 D4.2 D5.2 D7.1 FID1.1 FID2.1 FID3.1 FID4.1 FID5.1 FID6.1 FID7.1 FID8.1 J13.5 J13.6 J14.6 M1.0 M2.0 M3.0 M4.0 M5.0 M6.0 M7.0 M8.0 M9.0 M10.0 U1.3 U1.4 U1.5 U1.6 U1.11 U1.12 U1.13 U1.14 U2.2 U2.3 U2.4 U2.5 U2.6 U2.7 U2.8 U2.10 U2.15 U2.21 U2.22 U2.27 U2.28 U2.29 U2.30 U2.33 U2.37 U2.38 U2.41 U2.42 U2.47 U2.54 U2.55 U2.56 U2.57 U2.59 U2.60 U2.64 U2.65 U2.68 U3.5 U4.3 U4.4 U4.5 U4.6 U4.11 U4.12 U4.13 U4.14 U5.7 U6.5 U8.3 U8.4 U8.5 U8.6 U8.11 U8.12 U8.13 U8.14 U9.3 U9.4 U9.5 U9.6 U9.11 U9.12 U9.13 U9.14 U11.5 U12.5 U12.6 U16.1 U16.2 U16.10 U16.11 U16.12 U16.13 U16.14 U16.15 U16.16 U16.17 U16.18 U16.19 U16.20 U16.21 U16.22 U16.23 U16.24 U16.27 U16.28 U17.3 U17.4 U17.5 U17.6

## Polygon pours and split planes (outlines as drawn)
+5V_GREEN on Top Layer "Top Layer-NetA1_1" (solid, remove dead copper, pour order 1000): 10,4195 10,5490 535,5490 535,4965 185,4965 185,4195
NetC1_2 on Top Layer "Top Layer-NetC5_1" (solid, remove dead copper, pour order 1002): 250,3325 250,3525 310,3585 310,4050 730,4050 730,4180 880,4180 880,4075 590,3785 590,3470 445,3325
GND on Top Layer "Top Layer-GND" (solid, remove dead copper, pour order 1001): 13,4193.78 13,3570 298,3570 298,4035.76 733,4035.76 733,4719.21 913,4719.44 913,5211 548,5211 548,4954.22 198,4954.22 198,4188.84 13,4188.84
GND on Bottom Layer "GND" (solid): 5091,458 5092,459 5209,459 5209,341 5091,341 5091,458
GND on Bottom Layer "GND" (solid): 4321,1068 4457,1068 4457,816 4321,816 4321,1068
+5V_GREEN on Power (split plane): 358 vertices, not listed, extent 20.1,762.04 4752.96,5479.9
VCC on Power (split plane): 415 vertices, not listed, extent 20.1,20.1 5479.9,5479.9
GND on Ground (split plane): 5479.9,5201.68 5479.9,158.32 5341.68,20.1 2570.1,20.1 2570.1,260 2569.71,263.92 2568.57,267.69 2566.71,271.17 2564.21,274.21 2561.17,276.71 2557.69,278.57 2553.92,279.71 2550,280.1 2150,280.1 2146.08,279.71 2142.31,278.57 2138.83,276.71 2135.79,274.21 2133.29,271.17 2131.43,267.69 2130.29,263.92 2129.9,260 2129.9,20.1 20.1,20.1 20.1,129.9 250,129.9 253.92,130.29 257.69,131.43 261.17,133.29 264.21,135.79 266.71,138.83 268.57,142.31 269.71,146.08 270.1,150 270.1,1250 269.71,1253.92 268.57,1257.69 266.71,1261.17 264.21,1264.21 261.17,1266.71 257.69,1268.57 253.92,1269.71 250,1270.1 20.1,1270.1 20.1,5226.68 273.32,5479.9 2429.9,5479.9 2429.9,5310 2430.29,5306.08 2431.43,5302.31 2433.29,5298.83 2435.79,5295.79 2438.83,5293.29 2442.31,5291.43 2446.08,5290.29 2450,5289.9 2560,5289.9 2563.92,5290.29 2567.69,5291.43 2571.17,5293.29 2574.21,5295.79 2576.71,5298.83 2578.57,5302.31 2579.71,5306.08 2580.1,5310 2580.1,5479.9 5201.68,5479.9

## Keep-outs
Keep-Out Layer:
  circle w8: c2750,2750 r750
  lines w8: 0,0 0,5235 265,5500 5210,5500 5500,5210 5500,150 5350,0 0,0

## Other copper
Top Layer:
  region net GND: 4450,3440 4450,3230 4810,3230 4810,3440 4450,3440
  region net GND: 4450,3070 4450,2910 4810,2910 4810,3070 4450,3070
  region net NetQ2_5: 4440,3230 4120,3230 4120,3530 4440,3530 4440,3270
  region net NetQ1_5: 4440,3210 4440,2910 4120,2910 4120,3210
  region net NetC26_2: 680,3830 680,3380 1330,3380 1330,4160 900,4160 900,4040 680,3830
  region net GND: 720,2730 720,3360 1330,3360 1330,2740 720,2740 720,2700
  region net GND: 860,4630 1340,4630 1470,4500 1560,4500 1560,4260 1470,4180 860,4190 860,4630
  region net NetC12_2: 940,4700 940,5230 840,5230 840,5360 840,5480 1330,5480 1330,5230 1380,5190 1380,4700 940,4700
Bottom Layer:
  text "ELC0100PCB" at 100,2910 h32 r90
  text "REV 4" at 100,2180 h32 r90
Power (plane layer: these items are gaps in the copper):
  lines w8: 4210,4550 4400,4550 4400,4250 5200,4250 5200,5050 4400,5050 4400,4650 4210,4650
  lines w20: 1.08,4051.08 850,4051.08 1075,3826.08 ; 515,5500 515,5270 915.09,5270 1138.09,5047 1715.28,5047 1806,5137.73 1806,5179.27 1835.3,5250 1930.86,5250 1939.14,5270 2015.34,5270 2115.37,5270 2115.35,4850 2275.35,4690 ; 1079.68,3823.1 ccw(c2765,2750) 2278.06,4687.71
  text "NEGATIVE IMAGE - POWER PLANE" at 1825,5866 h250
Ground (plane layer: these items are gaps in the copper):
  lines w8: 4210,4650 4400,4650 4400,4250 5200,4250 5200,5050 4400,5050 4400,4750 4210,4750
  text "NEGATIVE IMAGE - GROUND PLANE" at 1703,6118 h250

## Silkscreen, mask and mechanical layers (free items; w line width, h text height)
Top Overlay:
  text "GND" at 2670,3690 h32
  text "1" at 2740,3540 h32
  text "BTN NEG" at 3390,3430 h50
  text "V IN" at 1750,3170 h32
  text "2" at 2030,3120 h32
  text "BTN POS" at 3690,2887.54 h50
  text "SPK-" at 3530,2580 h32
  text "3" at 2025,2355 h32
  text "CNH" at 1780,2260 h32
  text "SPK+" at 3530,2260 h32
  text "4" at 2735,1915 h32
  text "CNL" at 2680,1740 h32
  text "PLAYWORLD" at 40,20 h100
  text "ELC0100  REV 4" at 930,20 h100
Bottom Overlay:
  text "1" at 5310,5330 h32 r180
  text "CLK" at 4390,5130 h32 r90
  text "GND" at 4780,5130 h32 r90
  text "VCC" at 4980,5130 h32 r90
  text "MCLR" at 5180,5130 h32 r90
  text "DAT" at 4580,5100 h32 r90
Bottom Solder:
  rectangle: 5091,341 5209,459
  rectangle: 4322,817 4458,1068
Board Outline:
  the board outline again, w8
Dimensions:
  lines w12: 6725,4510 8825,4510
  text "NOTES:  UNLESS OTHERWISE SPECIFIED" at 6800,4560 h62.5
  text "1." at 6600,4335 h50
  text "MAT'L: FR-406 ROHS COMPLiANT, .062 THK." at 6740,4335 h50
  text "2." at 6600,4210 h50
  text "TOP AND BOTTOM LAYER - 1 OZ COPPER AFTER PLATING." at 6740,4210 h50
  text "3." at 6600,4085 h50
  text "POWER AND GROUND LAYER - 0.5 OZ COPPER." at 6740,4085 h50
  text "4." at 6600,3960 h50
  text "FINISH: GOLD FLASH OVER ALL EXPOSED COPPER" at 6740,3960 h50
  text "5." at 6600,3835 h50
  text "ALL HOLES ARE PLATED THRU W/ MIN .001 (1 OZ) COPPER." at 6740,3835 h50
  text "6." at 6600,3710 h50
  text "ALL DIMENSIONS ARE FINISHED DIMENSIONS:" at 6740,3710 h50
  text ".XXX = +/- .005  .XX = +/- .01  HOLE DIA = +/- .003." at 6740,3585 h50
  text "7." at 6600,3460 h50
  text "VENDOR'S UL APPROVAL MARK MUST BE ON BOARD, 94V-0." at 6740,3460 h50
  text "WEEK & YEAR OF FABRICATION TO BE STAMPED ON BOARD." at 6740,3335 h50
  text "8." at 6600,3210 h50
  text "SOLDERMASK BOTH SIDES OF BOARD. L.P.I. OVER BARE COPPER., BLUE INK" at 6740,3210 h50
  text "9." at 6600,3085 h50
  text "SILKSCREEN BOTH SIDES W/ WHITE EPOXY INK, OVER SOLDERMASK." at 6740,3085 h50
  text "10." at 6600,2960 h50
  text "LAYER STACK - TOP, GROUND, POWER, BOTTOM" at 6740,2960 h50
Cutouts:
  circle w10: c2750,2750 r720.07
  lines w5.91: 0,150 250,150 250,1250 0,1250 ; 350,150 650,150 650,1250 350,1250 350,150 ; 700,1510 700,1770 1380,1090 1380,830 700,1510 ; 750,150 950,150 950,650 750,850 750,150 ; 750,1010 1610,150 1950,150 750,1350 750,1010 ; 1050,150 1450,150 1050,550 1050,150 ; 1850,350 1850,550 2880,550 2880,350 1850,350 ; 3030,1890 3030,2020 3160,2020 3295,2155 3360,2090 3360,1970 3280,1890 3030,1890 ; 3530,2690 3680,2690 3680,2910 3530,2910 3530,2690
  lines w8: 2150,0 2150,260 2550,260 2550,0 ; 2450,5500 2450,5310 2560,5310 2560,5500 ; 2045,3430 2300,3685 2475,3685 2475,3555 2350,3430 2045,3430 ; 2200,1920 2200,2150 2245,2150 2400,1995 2480,1995 2480,1800 2320,1800 2200,1920 ; 2370,5040 2460,5040 2460,5200 2370,5200 2370,5040 ; 3020,3585 3185,3420 3390,3420 3130,3680 3020,3680 3020,3585

## Dimensions
5350,0 to 3914.3,4764.7 on Dimensions
5350,0 to 5298.99,3938.61 on Dimensions
5350,0 to 5062.5,2750 on Dimensions
5350,0 to 3906.2,747.3 on Dimensions
5350,0 to 3938.61,201.01 on Dimensions
0,0 to 1561.39,5298.99 on Dimensions
0,0 to 1593.7,4752.7 on Dimensions
0,0 to 437.5,2750 on Dimensions
0,0 to 201.01,1561.39 on Dimensions
0,0 to 1593.8,747.3 on Dimensions
0,5235 to 5298.99,3938.61 on Dimensions
0,5235 to 3914.3,4764.7 on Dimensions
0,5235 to 1593.7,4752.7 on Dimensions
0,5235 to 1561.39,5298.99 on Dimensions
0,5235 to 437.5,2750 on Dimensions
0,0 to 5062.5,2750 on Dimensions
0,0 to 3938.61,201.01 on Dimensions
0,0 to 3906.2,747.3 on Dimensions
0,0 to 1593.8,747.3 on Dimensions
0,0 to 201.01,1561.39 on Dimensions
0,0 to 5500,150 on Dimensions
0,0 to 0,5500 on Dimensions